# Altium PCB Test.PcbDoc
Units mm, origin at the board's own origin, x right, y up, seen from the top; angles counter-clockwise.
Board outline 110.4 x 66.5 mm, 2 copper layers (Top Layer, Bottom Layer); 148 components, 118 nets, 579 pads, 1 vias.
Unrouted connection lines stored in the file: 289.
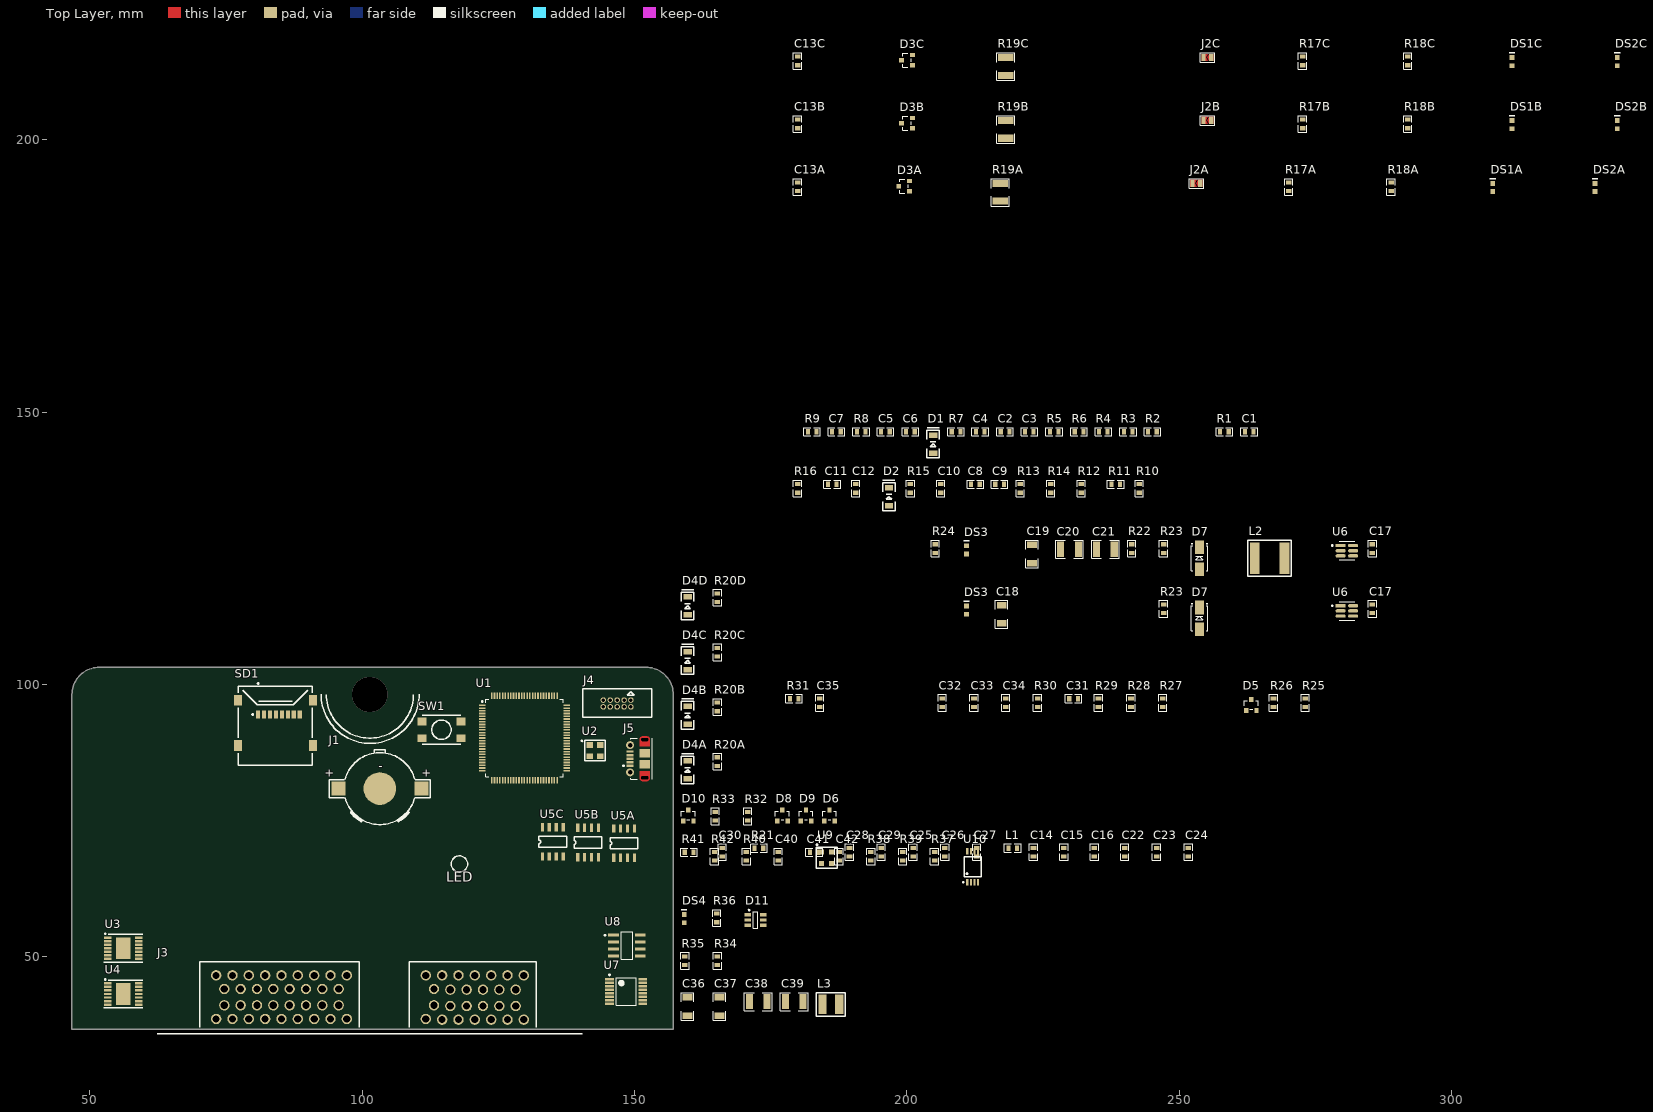
[diagram p0: Top Layer view]
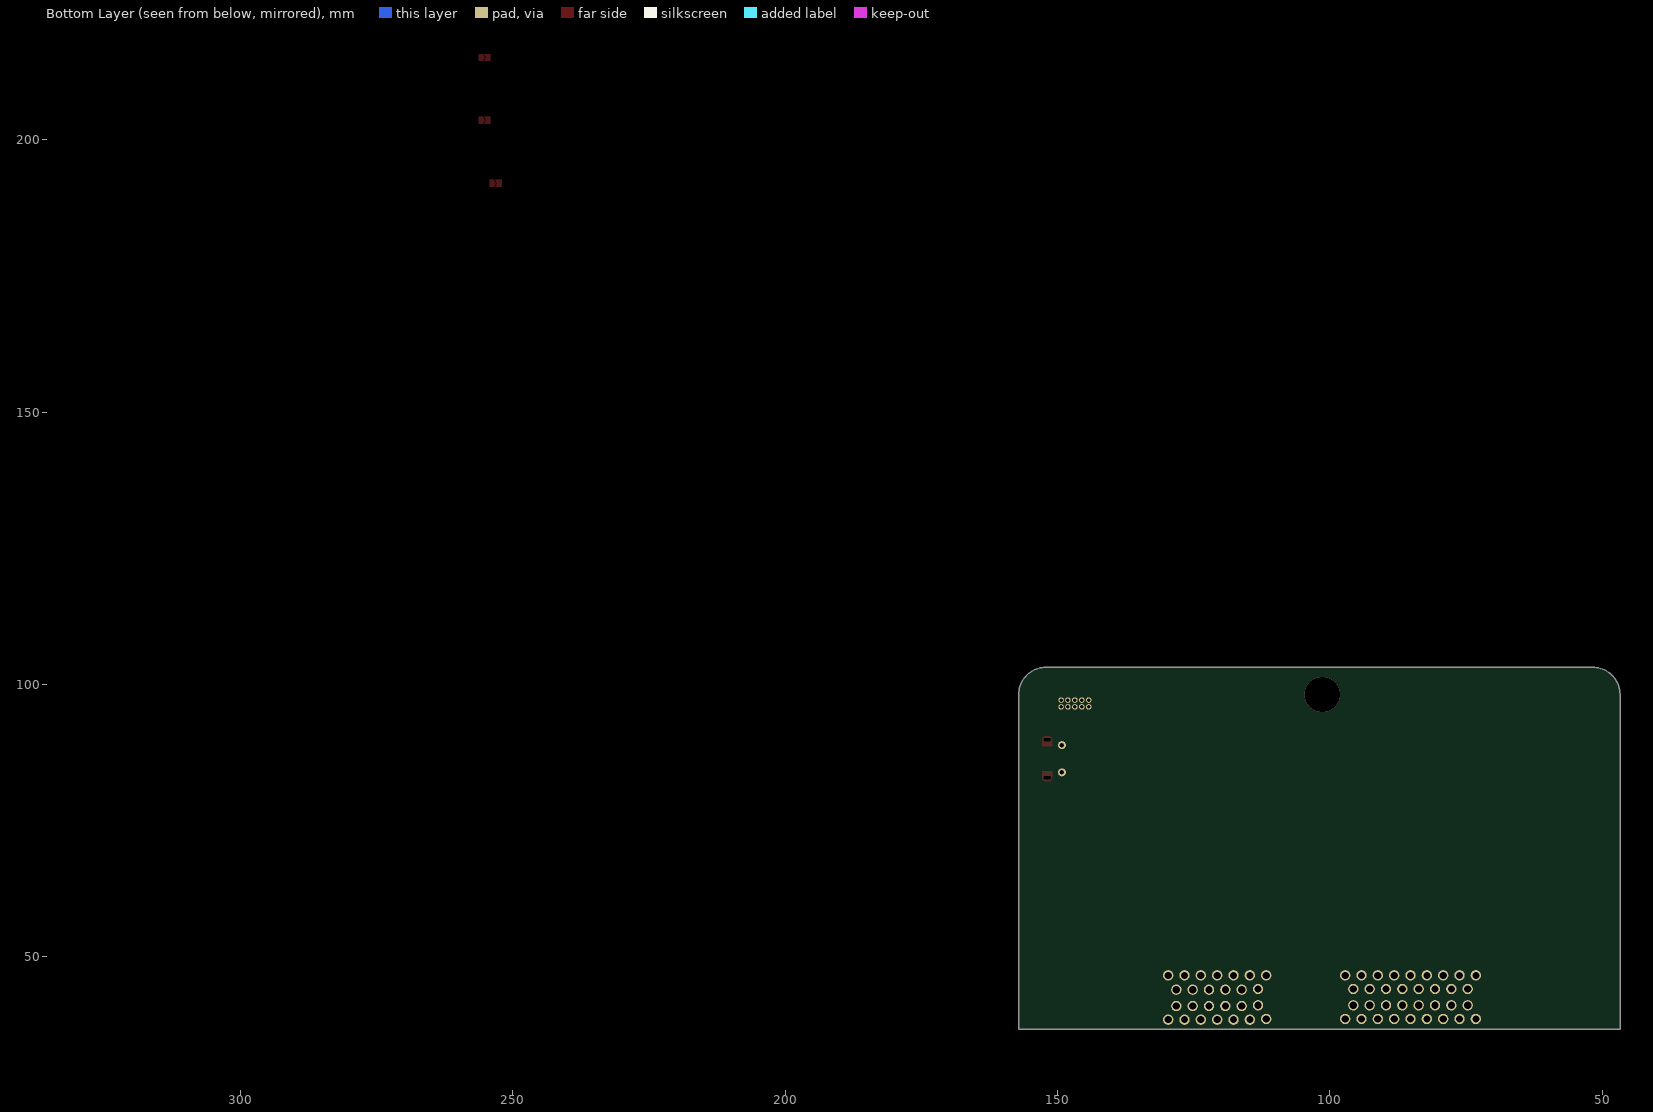
[diagram p1: Bottom Layer view, seen from below]

## Layer stack, top to bottom
Top Solder: solder mask 0.0102, Solder Resist, Dk 3.5
Top Layer: signal copper 0.0356
Dielectric 1: dielectric 0.32, FR-4, Dk 4.8
Bottom Layer: signal copper 0.0356
Bottom Solder: solder mask 0.0102, Solder Resist, Dk 3.5

## Board outline
46.718,36.663 157.118,36.663 157.118,98.163 ccw(c152.118,98.163) 152.118,103.163 51.718,103.163 ccw(c51.718,98.163) 46.718,98.163

## Design rules (kind name [scope] priority, off if disabled: settings)
Clearance [All] p1: gap=0.254 ignorepadtopadclearanceinfootprint=FALSE except(0: Arc-Hole Track-Hole SMDPad-Hole THPad-Hole Via-Hole Fill-Hole Poly-Hole Region-Hole Text-Hole)
DiffPairsRouting [All] p1: maxlimit=0.254 minlimit=0.254 mostfreqgap=0.254 toplayer_minwidth=0.381 toplayer_maxwidth=0.381 toplayer_prefwidth=0.381 bottomlayer_minwidth=0.381 bottomlayer_maxwidth=0.381 bottomlayer_prefwidth=0.381 maxuncoupledlength=12.7
PolygonConnect [All] p1: connectstyle=Relief reliefconductorwidth=0.254 reliefentries=4 polygonreliefangle="90 Angle" airgapwidth=0.254
RoutingVias [All] p1: holewidth=0.711 width=1.27 viastyle="Through Hole" minholewidth=0.711 minwidth=1.27 maxholewidth=0.711 maxwidth=1.27
SolderMaskExpansion [All] p1: expansion=0.102 istentingtop=FALSE
Width [All] p1: maxlimit=0.254 minlimit=0.254 preferedwidth=0.254
29 further rules are at their usual default settings.

## Classes and differential pairs
channel class CC-S07-V00-AnalogueIn: "Analog In1" "Analog In2" "Analog In3" "Analog In4" "Analog In5" "Analog In6" "Analog In7" "Analog In8" "Analog In9" "Analog In10" "Analog In11" "Analog In12"
channel class CC-S06-V00-DigitalIn: "Digital In1" "Digital In2" "Digital In3" "Digital In4"
net class DOUT[1..4]: DOUT1 DOUT2 DOUT3 DOUT4
net class DIN[1..4]: DIN1 DIN2 DIN3 DIN4
net class AOUT[1..12]: AOUT1 AOUT2 AOUT3 AOUT4 AOUT5 AOUT6 AOUT7 AOUT8 AOUT9 AOUT10 AOUT11 AOUT12
net class AIN[1..12]: AIN1 AIN2 AIN3 AIN4 AIN5 AIN6 AIN7 AIN8 AIN9 AIN10 AIN11 AIN12
component class "Power Selection": C40 C41 C42 R37 R38 R39 R40 R41 R42 U10
component class "Digital In4": D4D R20D
component class "Digital In3": D4C R20C
component class "Digital In2": D4B R20B
component class "Digital In1": D4A R20A
component class "Micocontroller Peripherals": C31 C32 C33 C34 C35 D11 DS4 J5 R25 R26 R27 R28 R29 R30 R31 R36 SD1
channel class CC-S03-V00-CANBUS: "CANBUS 1" "CANBUS 2" "CANBUS 3"
net class HSOUT[1..4]: HSOUT1 HSOUT2 HSOUT3 HSOUT4
net class HSEN[1..4]: HSEN1 HSEN2 HSEN3 HSEN4
net class HSDIAG[1..4]: HSDIAG1 HSDIAG2 HSDIAG3 HSDIAG4
net class HSADC[1..2]: HSADC1 HSADC2
component class "Serial Communications": D5 D6 D8 D9 D10 R32 R33 U7 U8
component class Microcontroller: C14 C15 C16 C22 C23 C24 C25 C26 C27 C28 C29 C30 J1 J4 L1 R21 SW1 U1 U2 U9
component class "High Side Outputs": C1 C2 C3 C4 C5 C6 C7 C8 C9 C10 C11 C12 D1 D2 R1 R2 R3 R4 R5 R6 R7 R8 R9 R10 R11 R12 R13 R14 R15 R16 U3 U4
component class Connector: J3
component class "CANBUS 3": C13C D3C DS1C DS2C J2C R17C R18C R19C U5C
component class "CANBUS 2": C13B D3B DS1B DS2B J2B R17B R18B R19B U5B
component class "CANBUS 1": C13A D3A DS1A DS2A J2A R17A R18A R19A U5A
component class "5V Supply": C17 D7 DS3 R23 R34 R35 U6
component class "3V3 Supply": C17 C36 C37 C38 C39 D7 DS3 L3 R23 U6
differential pair USB: +USB_P -USB_N
differential pair "USB ESD D": +"USB ESD D_P" -"USB ESD D_N"
differential pair "USB D": +"USB D_P" -"USB D_N"

## Components (designator, comment, footprint, x,y, rotation, side; value= is the part's Value field where it differs from the comment)
C1 "100nF" Cap_Ceramic_0603 262.89,146.431 r0 top
C2 "10nF" Cap_Ceramic_0603 218.059,146.431 r0 top
C3 "10nF" Cap_Ceramic_0603 222.504,146.431 r0 top
C4 "47nF" Cap_Ceramic_0603 213.487,146.431 r0 top
C5 "100nF" Cap_Ceramic_0603 196.088,146.431 r0 top
C6 "100nF" Cap_Ceramic_0603 200.66,146.431 r0 top
C7 "100nF" Cap_Ceramic_0603 187.071,146.431 r0 top
C8 "10nF" Cap_Ceramic_0603 212.598,136.779 r0 top
C9 "10nF" Cap_Ceramic_0603 217.043,136.779 r0 top
C10 "47nF" Cap_Ceramic_0603 206.248,136.017 r90 top
C11 "100nF" Cap_Ceramic_0603 186.309,136.779 r0 top
C12 "100nF" Cap_Ceramic_0603 190.627,136.017 r90 top
C13A "100nF" Cap_Ceramic_0603 179.959,191.389 r90 top (schematic designator C13)
C13B "100nF" Cap_Ceramic_0603 179.959,202.946 r90 top (schematic designator C13)
C13C "100nF" Cap_Ceramic_0603 179.959,214.503 r90 top (schematic designator C13)
C14 "4u7" Cap_Ceramic_0603 223.266,69.215 r90 top
C15 "100nF" Cap_Ceramic_0603 228.854,69.215 r90 top
C16 "100nF" Cap_Ceramic_0603 234.442,69.215 r90 top
C17 "100nF 100V" Cap_Ceramic_0603 285.496,113.919 r90 top
C17 "100nF 100V" Cap_Ceramic_0603 285.496,124.968 r90 top
C18 "22uF 35V 1206" Cap_Ceramic_1206 217.424,112.903 r90 top
C19 "22uF 35V 1206" Cap_Ceramic_1206 223.012,123.952 r90 top
C20 "47uF 16V 1210" Cap_Ceramic_1210 229.87,124.841 r0 top
C21 "47uF 16V 1210" Cap_Ceramic_1210 236.474,124.841 r0 top
C22 "100nF" Cap_Ceramic_0603 240.03,69.215 r90 top
C23 "100nF" Cap_Ceramic_0603 245.872,69.215 r90 top
C24 "100nF" Cap_Ceramic_0603 251.714,69.215 r90 top
C25 "1uF" Cap_Ceramic_0603 201.168,69.215 r90 top
C26 "100nF" Cap_Ceramic_0603 207.01,69.215 r90 top
C27 "10nF" Cap_Ceramic_0603 212.852,69.215 r90 top
C28 "2u2" Cap_Ceramic_0603 189.484,69.215 r90 top
C29 "2u2" Cap_Ceramic_0603 195.326,69.215 r90 top
C30 "100nF" Cap_Ceramic_0603 166.116,69.215 r90 top
C31 "100nF" Cap_Ceramic_0603 230.632,97.409 r0 top
C32 "4u7" Cap_Ceramic_0603 206.502,96.647 r90 top
C33 "1uF" Cap_Ceramic_0603 212.344,96.647 r90 top
C34 "100nF" Cap_Ceramic_0603 218.186,96.647 r90 top
C35 "100nF" Cap_Ceramic_0603 184.023,96.647 r90 top
C36 "22uF 35V 1206" Cap_Ceramic_1206 159.766,40.894 r90 top
C37 "22uF 35V 1206" Cap_Ceramic_1206 165.608,40.894 r90 top
C38 "47uF 16V 1210" Cap_Ceramic_1210 172.72,41.783 r0 top
C39 "47uF 16V 1210" Cap_Ceramic_1210 179.324,41.783 r0 top
C40 "1uF" Cap_Ceramic_0603 176.403,68.453 r90 top
C41 "100nF" Cap_Ceramic_0603 183.007,69.215 r0 top
C42 "100nF" Cap_Ceramic_0603 187.579,68.453 r90 top
D1 "BZT52B3V3-G3-08" SOD123 204.851,144.145 r90 top
D2 "BZT52B3V3-G3-08" SOD123 196.723,134.493 r90 top
D3A "NUP2105L" NUP2105L 199.517,191.516 r90 top (schematic designator D3)
D3B "NUP2105L" NUP2105L 200.025,203.073 r90 top (schematic designator D3)
D3C "NUP2105L" NUP2105L 200.025,214.63 r90 top (schematic designator D3)
D4A "BZT52B3V3-G3-08" SOD123 159.766,84.328 r90 top (schematic designator D4)
D4B "BZT52B3V3-G3-08" SOD123 159.766,94.361 r90 top (schematic designator D4)
D4C "BZT52B3V3-G3-08" SOD123 159.766,104.394 r90 top (schematic designator D4)
D4D "BZT52B3V3-G3-08" SOD123 159.766,114.427 r90 top (schematic designator D4)
D5 "NUP2105L" NUP2105L 263.271,96.266 r0 top
D6 "NUP2105L" NUP2105L 185.801,75.946 r0 top
D7 "B260A-13-F" SMA 253.746,112.141 r90 top
D7 "B260A-13-F" SMA 253.746,123.19 r90 top
D8 "NUP2105L" NUP2105L 177.165,75.946 r0 top
D9 "NUP2105L" NUP2105L 181.483,75.946 r0 top
D10 "NUP2105L" NUP2105L 159.893,75.946 r0 top
D11 "USBLC6-2SC6" USBLC6-2SC6 172.212,56.769 r0 top
DS1A "LED Blue 0603" "LED BLUE 0603" 307.594,191.262 r90 top (schematic designator DS1)
DS1B "LED Blue 0603" "LED BLUE 0603" 311.15,202.819 r90 top (schematic designator DS1)
DS1C "LED Blue 0603" "LED BLUE 0603" 311.15,214.376 r90 top (schematic designator DS1)
DS2A "LED Blue 0603" "LED BLUE 0603" 326.39,191.262 r90 top (schematic designator DS2)
DS2B "LED Blue 0603" "LED BLUE 0603" 330.454,202.819 r90 top (schematic designator DS2)
DS2C "LED Blue 0603" "LED BLUE 0603" 330.454,214.376 r90 top (schematic designator DS2)
DS3 "LED Green 0603" "LED GREEN 0603" 210.947,113.665 r90 top
DS3 "LED Green 0603" "LED GREEN 0603" 210.947,124.714 r90 top
DS4 "LED Green 0603" "LED GREEN 0603" 159.131,57.023 r90 top
J1 "Keystone 2984" "KEYSTONE 2894" 103.251,80.899 r180 top
J2A "Jumper 2Way Solderable" Jumper_2Way_Solderable 253.873,192.024 r90 top (schematic designator J2)
J2B "Jumper 2Way Solderable" Jumper_2Way_Solderable 255.905,203.581 r90 top (schematic designator J2)
J2C "Jumper 2Way Solderable" Jumper_2Way_Solderable 255.905,215.138 r90 top (schematic designator J2)
J3 "3-6437285-2" "SUPERSEAL RIGHT 60WAY" 104.434,32.095 r0 top
J4 "IDC 10P 2x5 1.27mm" "IDC 1.27MM 10P" 146.812,96.52 r180 top
J5 "105017-0001" 105017-0001 150.542,86.376 r90 top
L1 "10uH" Inductor_0603 219.456,69.977 r0 top
L2 "74404064221" Inductor_6x6mm 266.573,123.19 r0 top
L3 "74404042470" INDUCTOR_4X3MM_1.8MM 186.055,41.275 r0 top
R1 "4k7" Res_ThinFilm_0603 258.318,146.431 r0 top
R2 "4k7" Res_ThinFilm_0603 245.11,146.431 r0 top
R3 "4k7" Res_ThinFilm_0603 240.665,146.431 r0 top
R4 "4k7" Res_ThinFilm_0603 236.093,146.431 r0 top
R5 "4k7" Res_ThinFilm_0603 227.076,146.431 r0 top
R6 "4k7" Res_ThinFilm_0603 231.648,146.431 r0 top
R7 "1k2" Res_ThinFilm_0603 209.042,146.431 r0 top
R8 "47R" Res_ThinFilm_0603 191.643,146.431 r0 top
R9 "4k7" Res_ThinFilm_0603 182.626,146.431 r0 top
R10 "4k7" Res_ThinFilm_0603 242.697,136.017 r90 top
R11 "4k7" Res_ThinFilm_0603 238.379,136.779 r0 top
R12 "4k7" Res_ThinFilm_0603 232.029,136.017 r90 top
R13 "4k7" Res_ThinFilm_0603 220.853,136.017 r90 top
R14 "4k7" Res_ThinFilm_0603 226.441,136.017 r90 top
R15 "1k2" Res_ThinFilm_0603 200.66,136.017 r90 top
R16 "47R" Res_ThinFilm_0603 179.959,136.017 r90 top
R17A "330R 5% 0603" Res_ThinFilm_0603 270.129,191.389 r90 top (schematic designator R17)
R17B "330R 5% 0603" Res_ThinFilm_0603 272.669,202.946 r90 top (schematic designator R17)
R17C "330R 5% 0603" Res_ThinFilm_0603 272.669,214.503 r90 top (schematic designator R17)
R18A "330R 5% 0603" Res_ThinFilm_0603 288.925,191.389 r90 top (schematic designator R18)
R18B "330R 5% 0603" Res_ThinFilm_0603 291.973,202.946 r90 top (schematic designator R18)
R18C "330R 5% 0603" Res_ThinFilm_0603 291.973,214.503 r90 top (schematic designator R18)
R19A "120R 1% 1210" Res_ThinFilm_1210 217.17,190.373 r90 top (schematic designator R19)
R19B "120R 1% 1210" Res_ThinFilm_1210 218.186,201.93 r90 top (schematic designator R19)
R19C "120R 1% 1210" Res_ThinFilm_1210 218.186,213.487 r90 top (schematic designator R19)
R20A "10k 5% 0603" Res_ThinFilm_0603 165.227,85.852 r90 top (schematic designator R20)
R20B "10k 5% 0603" Res_ThinFilm_0603 165.227,95.885 r90 top (schematic designator R20)
R20C "10k 5% 0603" Res_ThinFilm_0603 165.227,105.918 r90 top (schematic designator R20)
R20D "10k 5% 0603" Res_ThinFilm_0603 165.227,115.951 r90 top (schematic designator R20)
R21 "4k7 5% 0603" Res_ThinFilm_0603 172.847,69.977 r0 top
R22 "64k9 1%" Res_ThinFilm_0603 241.3,124.968 r90 top
R23 "1k" Res_ThinFilm_0603 247.142,113.919 r90 top
R23 "1k" Res_ThinFilm_0603 247.142,124.968 r90 top
R24 "19k6 1%" Res_ThinFilm_0603 205.232,124.968 r90 top
R25 "10k" Res_ThinFilm_0603 273.177,96.647 r90 top
R26 "15k" Res_ThinFilm_0603 267.335,96.647 r90 top
R27 "22R" Res_ThinFilm_0603 247.015,96.647 r90 top
R28 "22R" Res_ThinFilm_0603 241.173,96.647 r90 top
R29 "100k" Res_ThinFilm_0603 235.204,96.647 r90 top
R30 "100k" Res_ThinFilm_0603 224.028,96.647 r90 top
R31 "100k" Res_ThinFilm_0603 179.324,97.409 r0 top
R32 "1k 5% 0603" Res_ThinFilm_0603 170.815,75.819 r90 top
R33 "1k 5% 0603" Res_ThinFilm_0603 164.846,75.819 r90 top
R34 "111k 1%" Res_ThinFilm_0603 165.227,49.276 r90 top
R35 "20k 1%" Res_ThinFilm_0603 159.258,49.276 r90 top
R36 "1k" Res_ThinFilm_0603 165.1,57.15 r90 top
R37 "10k" Res_ThinFilm_0603 205.105,68.453 r90 top
R38 "0R" Res_ThinFilm_0603 193.421,68.453 r90 top
R39 "DNF 0603" Res_ThinFilm_0603 199.263,68.453 r90 top
R40 "820R" Res_ThinFilm_0603 170.561,68.453 r90 top
R41 "DNF 0603" Res_ThinFilm_0603 160.02,69.215 r0 top
R42 "0R" Res_ThinFilm_0603 164.719,68.453 r90 top
SD1 "47219-2001" 47219-2001 84.074,92.964 r0 top
SW1 "BTN Standard 4.5mm" "BTN STANDARD 4.5mm X 4.5mm" 114.554,91.694 r180 top
U1 "STM32F765VI" LQFP-100 129.794,90.17 r0 top
U2 "DSC1001DI1-008.0000T" DSC1001DI1-008.0000TCT-ND 142.748,87.884 r0 top
U3 "BTS7080-2EPA" BTS70802EPA 56.134,51.562 r0 top
U4 "BTS7080-2EPA" BTS70802EPA 56.134,43.18 r0 top
U5A "SN65HVD233" SN65HVD233DR 148.082,70.866 r90 top (schematic designator U5)
U5B "SN65HVD233" SN65HVD233DR 141.478,70.993 r90 top (schematic designator U5)
U5C "SN65HVD233" SN65HVD233DR 135.001,71.12 r90 top (schematic designator U5)
U6 "LMR14010" LMR14010 280.797,113.538 r0 top
U6 "LMR14010" LMR14010 280.797,124.587 r0 top
U7 "MAX3232ECPWR" PW0016A_M 148.461,43.632 r0 top
U8 "MAX3490EESA+" FP-S8-5-MFG 148.59,52.07 r0 top
U9 "DSC6083CI2A-032K768" DSC6083CI2A-032K768 185.293,68.199 r0 top
U10 "TPS2115A" TPS2115A 212.09,66.548 r90 top

## Footprints (in the part's own frame and the unit in brackets; to place one, negate y for a bottom-side part, rotate by r counter-clockwise, add the part's x,y. Pads: shape width x height; smd on the part's side, far side on the other; paste and mask are expansions set on the pad)
47219-2001 [mm]
  rect 0.8x1.5 smd: 1(-3.205,1.55) 2(-2.105,1.55) 3(-1.005,1.55) 4(0.095,1.55) 5(1.195,1.55) 6(2.295,1.55) 7(3.395,1.55) 8(4.495,1.55)
  rect 1.45x2 smd: 9(6.875,4.15) 10(6.875,-4.15) 11(-6.875,-4.15) 12(-6.875,4.15)
  silkscreen extent -6.8,-7.8 6.8,7.36, body extent -7.3,-7.79 7.3,6.71, height 1.91
105017-0001 [mm]
  rect 0.4x1.35 smd: 1(-1.3,1.35) 2(-0.65,1.35) 3(0,1.35) 4(0.65,1.35) 5(1.3,1.35)
  round 1.45 hole 0.85: 6(-2.5,1.35) 7(2.5,1.35)
  rrect50% 0x0 hole 0.6 slot 1.3 at 90 deg: 8(-3.5,-1.35) 11(3.5,-1.35)
  rect 1.5x1.9 smd: 9(-1,-1.35) 10(1,-1.35)
  Top Layer circle w0.5: c3.6,-0.9 r0.25
  Top Layer circle w0.5: c3.6,-1.8 r0.25
  Top Layer circle w0.5: c-3.6,-0.9 r0.25
  Top Layer circle w0.5: c-3.6,-1.8 r0.25
  Top Layer region: -2.3,-2.3 -2.3,-0.4 -3.6,-0.4 -3.6,-2.3
  Top Layer region: 2.3,-0.4 2.3,-2.3 3.6,-2.3 3.6,-0.4
  Top Layer region: 3.6,-0.9 3.6,-1.8 4.1,-1.8 4.1,-0.9
  Top Layer region: -3.6,-1.8 -3.6,-0.9 -4.1,-0.9 -4.1,-1.8
  silkscreen extent -3.75,-2.69 3.75,2.7, body extent -4.1,-3.9 4.1,1.5, height 2.67
"BTN STANDARD 4.5mm X 4.5mm" [mil]
  rect 65x55 smd: 1(-140,60) 2(140,60) 3(-140,-60) 4(140,-60)
  silkscreen extent -140,-105 140,105, body extent -148,-89 148,89, height 165
BTS70802EPA [mm]
  rect 1.32x0.45 smd: 1(-2.85,1.95) 2(-2.85,1.3) 3(-2.85,0.65) 4(-2.85,0) 5(-2.85,-0.65) 6(-2.85,-1.3) 7(-2.85,-1.95) 8(2.85,-1.95) 9(2.85,-1.3) 10(2.85,-0.65) 11(2.85,0) 12(2.85,0.65) 13(2.85,1.3) 14(2.85,1.95)
  rect 2.65x4 smd: 15(0,0)
  silkscreen extent -3.56,-2.54 3.56,2.79
Cap_Ceramic_0603 [mil]
  rect 30x40 smd: 1(-31.24,0) 2(31.24,0)
  silkscreen extent -60,-30 60,30, body extent -31,-16 32,16, height 33
Cap_Ceramic_1206 [mil]
  rect 47x71 smd: 1(-66.08,0) 2(66.08,0)
  silkscreen extent -100,-45 100,45, body extent -63,-31 63,32, height 53
Cap_Ceramic_1210 [mm]
  rect 1.3x2.8 smd: 1(-1.625,0) 2(1.625,0)
  silkscreen extent -2.54,-1.65 2.54,1.65, body extent -1.6,-1.25 1.6,1.25, height 1.35
DSC1001DI1-008.0000TCT-ND [mm]
  rect 1.219x1.092 smd: 1(-0.95,1.05) 2(0.95,1.05) 3(0.95,-1.05) 4(-0.95,-1.05)
  silkscreen extent -2.54,-1.91 1.91,1.91, body extent -1.25,-1.6 1.25,1.6, height 0.85
DSC6083CI2A-032K768 [mm]
  rect 1x0.9 smd: 1(-0.95,1.05) 2(-0.95,-1.05) 3(0.95,-1.05) 4(0.95,1.05)
  silkscreen extent -1.91,-1.91 1.91,2.54, body extent -1.25,-1.6 1.25,1.65, height 1.15
FP-S8-5-MFG [mm]
  rect 1.98x0.53 smd paste+0 mask+0: 1(-2.465,1.905) 2(-2.465,0.635) 3(-2.465,-0.635) 4(-2.465,-1.905) 5(2.465,-1.905) 6(2.465,-0.635) 7(2.465,0.635) 8(2.465,1.905)
  silkscreen extent -4.15,-2.5 1.05,2.5, body extent -3.55,-2.75 3.55,2.75, height 0.25
"IDC 1.27MM 10P" [mil]
  round 40 hole 25: 1(-100,-25) 2(-100,25) 3(-50,-25) 4(-50,25) 5(0,-25) 6(0,25) 7(50,-25) 8(50,25) 9(100,-25) 10(100,25)
  silkscreen extent -250,-105 250,100, body extent -249,-104 249,100, height 214
INDUCTOR_4X3MM_1.8MM [mm]
  rect 1.5x3.6 smd: 1(-1.55,0) 2(1.55,0)
  silkscreen extent -2.67,-2.16 2.67,2.16, body extent -2,-2 2,2, height 1.8
Inductor_6x6mm [mm]
  rect 1.8x5.7 smd: 1(-2.667,0) 2(2.794,0)
  silkscreen extent -3.94,-3.3 4.06,3.3, body extent -3,-3 3,3, height 4.56
Inductor_0603 [mil]
  rect 30x40 smd: 1(-31.24,0) 2(31.24,0)
  silkscreen extent -60,-30 60,30, body extent -31,-16 32,16, height 18
Jumper_2Way_Solderable [mil]
  rect 50x30 smd: 1(0,55) 2(0,0)
  Top Layer region: -25,25 0,40 25,25 25,70 -25,70
  Top Layer region: -25,15 0,30 25,15 25,-15 0,-15 -25,-15
  silkscreen extent -35,-25 35,80
"KEYSTONE 2894" [mm]
  rect 2.54x2.54 smd: 1(-7.62,0) 1(7.62,0)
  round 6 smd paste-25.4: 2(0,0)
  silkscreen extent -9.27,-7.11 9.27,6.6, body extent -9.02,-7.42 8.76,6.03, height 2.41
"LED BLUE 0603" [mil]
  rect 35x35 smd: 1(-30,0) 2(30,0)
  silkscreen extent 65,-20 65,20, body extent -40,-20 40,20, height 30
"LED GREEN 0603" [mil]
  rect 35x35 smd: 1(-30,0) 2(30,0)
  silkscreen extent 65,-20 65,20, body extent -40,-20 40,20, height 30
LMR14010 [mm]
  rect 1.854x0.612 smd paste+0: 1(-1.136,0.933)
  rrect100% 1.854x0.612 smd paste+0: 2(-1.136,-0.017) 3(-1.136,-0.967) 4(1.164,-0.967) 5(1.164,-0.017) 6(1.164,0.933)
  silkscreen extent -2.79,-1.72 1.41,1.68, body extent -1.39,-1.47 1.41,1.43, height 1.1
LQFP-100 [mm]
  rect 1.2x0.3 smd paste+0: 1(-7.75,6.001) 2(-7.75,5.501) 3(-7.75,5.001) 4(-7.75,4.501) 5(-7.75,4.001) 6(-7.75,3.501) 7(-7.75,3.001) 8(-7.75,2.501) 9(-7.75,2.001) 10(-7.75,1.501) 11(-7.75,1.001) 12(-7.75,0.501) 13(-7.75,0.001) 14(-7.75,-0.499) 15(-7.75,-0.999) 16(-7.75,-1.499) 17(-7.75,-1.999) 18(-7.75,-2.499) 19(-7.75,-2.999) 20(-7.75,-3.499) 21(-7.75,-3.999) 22(-7.75,-4.499) 23(-7.75,-4.999) 24(-7.75,-5.499) 25(-7.75,-5.999) 51(7.75,-5.999) 52(7.75,-5.499) 53(7.75,-4.999) 54(7.75,-4.499) 55(7.75,-3.999) 56(7.75,-3.499) 57(7.75,-2.999) 58(7.75,-2.499) 59(7.75,-1.999) 60(7.75,-1.499) 61(7.75,-0.999) 62(7.75,-0.499) 63(7.75,0.001) 64(7.75,0.501) 65(7.75,1.001) 66(7.75,1.501) 67(7.75,2.001) 68(7.75,2.501) 69(7.75,3.001) 70(7.75,3.501) 71(7.75,4.001) 72(7.75,4.501) 73(7.75,5.001) 74(7.75,5.501) 75(7.75,6.001)
  rect 0.3x1.2 smd paste+0: 26(-6,-7.749) 27(-5.5,-7.749) 28(-5,-7.749) 29(-4.5,-7.749) 30(-4,-7.749) 31(-3.5,-7.749) 32(-3,-7.749) 33(-2.5,-7.749) 34(-2,-7.749) 35(-1.5,-7.749) 36(-1,-7.749) 37(-0.5,-7.749) 38(0,-7.749) 39(0.5,-7.749) 40(1,-7.749) 41(1.5,-7.749) 42(2,-7.749) 43(2.5,-7.749) 44(3,-7.749) 45(3.5,-7.749) 46(4,-7.749) 47(4.5,-7.749) 48(5,-7.749) 49(5.5,-7.749) 50(6,-7.749) 76(6,7.751) 77(5.5,7.751) 78(5,7.751) 79(4.5,7.751) 80(4,7.751) 81(3.5,7.751) 82(3,7.751) 83(2.5,7.751) 84(2,7.751) 85(1.5,7.751) 86(1,7.751) 87(0.5,7.751) 88(0,7.751) 89(-0.5,7.751) 90(-1,7.751) 91(-1.5,7.751) 92(-2,7.751) 93(-2.5,7.751) 94(-3,7.751) 95(-3.5,7.751) 96(-4,7.751) 97(-4.5,7.751) 98(-5,7.751) 99(-5.5,7.751) 100(-6,7.751)
  silkscreen extent -7.87,-7.1 7.1,7.1, body extent -8.01,-8.01 8.01,8.01, height 1.6
NUP2105L [mm]
  rect 0.8x0.9 smd: 1(-0.95,-1) 2(0.95,-1) 3(0,1)
  silkscreen extent -1.27,-0.76 1.27,0.76, body extent -1.45,-1.22 1.45,1.18, height 1
PW0016A_M [mm] "SOP, 16-Leads, Body 5.1x4.5mm, Pitch 0.65mm, IPC Low Density"
  rrect22% 1.6x0.45 smd: 1(-3.05,2.275) 2(-3.05,1.625) 3(-3.05,0.975) 4(-3.05,0.325) 5(-3.05,-0.325) 6(-3.05,-0.975) 7(-3.05,-1.625) 8(-3.05,-2.275) 9(3.05,-2.275) 10(3.05,-1.625) 11(3.05,-0.975) 12(3.05,-0.325) 13(3.05,0.325) 14(3.05,0.975) 15(3.05,1.625) 16(3.05,2.275)
  silkscreen extent -3.17,-2.55 1.85,3.17, body extent -3.21,-2.5 3.21,2.5, height 1
Res_ThinFilm_0603 [mil]
  rect 30x40 smd: 1(-31.24,0) 2(31.24,0)
  silkscreen extent -60,-30 60,30, body extent -31,-16 32,16, height 18
Res_ThinFilm_1210 [mm]
  rect 1.3x2.8 smd: 1(-1.625,0) 2(1.625,0)
  silkscreen extent -2.54,-1.65 2.54,1.65, body extent -1.6,-1.25 1.6,1.25, height 0.6
SMA [mm]
  rect 2.5x1.7 smd: A(-2,0) K(2,0)
  silkscreen extent -2.3,-1.52 2.67,1.52, body extent -2.52,-1.46 2.52,1.46, height 2.4
SN65HVD233DR [mm]
  rect 1.55x0.6 smd: 1(-2.7,1.903) 2(-2.7,0.633) 3(-2.7,-0.637) 4(-2.7,-1.907) 5(2.7,-1.907) 6(2.7,-0.637) 7(2.7,0.633) 8(2.7,1.903)
  silkscreen extent -1.04,-2.54 1.04,2.54, body extent -3.01,-2.45 3.01,2.45, height 1.63
SOD123 [mil]
  rect 40x60 smd: A(-65,0) K(65,0)
  silkscreen extent -100,-45 118,45, body extent -74,-33 74,33, height 47
"SUPERSEAL RIGHT 60WAY" [mm]
  round 1.905 hole 1.321: A1(7.25,14.5) A2(10.25,14.5) A3(13.25,14.5) A4(16.25,14.5) A5(19.25,14.5) A6(22.25,14.5) A7(25.25,14.5) A8(8.75,12) A9(11.75,11.873) A10(14.75,11.873) A11(17.75,11.873) A12(20.75,11.873) A13(23.75,11.873) A14(8.75,9) A15(11.75,8.873) A16(14.75,8.873) A17(17.75,8.873) A18(20.75,8.873) A19(23.75,8.873) A20(7.25,6.5) A21(10.25,6.373) A22(13.25,6.373) A23(16.25,6.373) A24(19.25,6.373) A25(22.25,6.373) A26(25.25,6.373) B1(-31.25,14.5) B2(-28.25,14.5) B3(-25.25,14.5) B4(-22.25,14.5) B5(-19.25,14.5) B6(-16.25,14.5) B7(-13.25,14.5) B8(-10.25,14.5) B9(-7.25,14.5) B10(-29.75,12) B11(-26.75,12) B12(-23.75,12) B13(-20.75,12) B14(-17.75,12) B15(-14.75,12) B16(-11.75,12) B17(-8.75,12) B18(-29.75,9) B19(-26.75,9) B20(-23.75,9) B21(-20.75,9) B22(-17.75,9) B23(-14.75,9) B24(-11.75,9) B25(-8.75,9) B26(-31.25,6.5) B27(-28.25,6.5) B28(-25.25,6.5) B29(-22.25,6.5) B30(-19.25,6.5) B31(-16.25,6.5) B32(-13.25,6.5) B33(-10.25,6.5) B34(-7.25,6.5)
  rect 0x0 hole 3.3: N/C(-38.5,0) N/C(0,0) N/C(32.5,0)
  silkscreen extent -42.04,3.81 35.94,17.02, body extent -42.3,-19.48 35.7,17.02, height 24.75
TPS2115A [mm]
  rect 1.2x0.4 smd: 1(-2.85,0.975) 2(-2.85,0.325) 3(-2.85,-0.325) 4(-2.85,-0.975) 5(2.85,-0.975) 6(2.85,-0.325) 7(2.85,0.325) 8(2.85,0.975)
  silkscreen extent -2.98,-1.55 1.85,1.85, body extent -3.23,-1.5 3.23,1.5, height 1.2
USBLC6-2SC6 [mm] "USBLC6-2SC6"
  rect 1.2x0.6 smd: 1(-1.397,0.95) 2(-1.397,0) 3(-1.397,-0.95) 4(1.397,-0.95) 5(1.397,0) 6(1.397,0.95)
  silkscreen extent -1.27,-1.55 0.38,1.92, body extent -1.6,-1.52 1.6,1.53, height 1.5

## Part data
C1 C5 C6 C7 C11 C12 C13A C13B C13C C15 C16 C22 C23 C24 C26 C30 C31 C34 C35 C41 C42: library part "100nF 50V 5% X7R 0603", "Capacitor, Ceramic, SMD, 100nF, 50V, 5%, X7R, 0603"
C2 C3 C8 C9 C27: library part "10nF 50V 5% X7R 0603", "Capacitor, Ceramic, SMD, 10nF, 50V, 5%, X7R, 0603"
C4 C10: library part "47nF 50V 5% X7R 0603", "Capacitor, Ceramic, SMD, 47nF, 50V, 5%, X7R, 0603"
C14 C32: library part "4u7 50V 5% X7R 0603", "Capacitor, Ceramic, SMD, 4u7, 50V, 5%, X7R, 0603"
C17 C17: library part "100nF 100V 5% X7R 0603", "Capacitor, Ceramic, SMD, 100nF, 100V, 5%, X7R, 0603"
C18 C19 C36 C37: library part "22uF 35V 10% X7R 1206", "Capacitor, Ceramic, SMD, 22uF, 35V, 10%, X7R, 1206"
C20 C21 C38 C39: library part "47uF 16V 10% X7R 1210", "Capacitor, Ceramic, SMD, 47uF, 16V, 5%, X7R, 1210"
C25 C33 C40: library part "1uF 25V 5% X7R 0603", "Capacitor, Ceramic, SMD, 1uF, 25V, 5%, X7R, 0603"
C28 C29: library part "2u2 25V 5% X7R 0603", "Capacitor, Ceramic, SMD, 2u2, 25V, 5%, X7R, 0603"
D1 D2 D4A D4B D4C D4D: "Diode, SMD, Zenner, 3.3V, 2%, 410mW, SOD-123", ComponentLink1Description=Digikey, ComponentLink1URL=https://www.digikey.com.au/product-detail/en/vishay-semiconductor-diodes-division/BZT52B3V3-G3-08/BZT52B3V3-G3-08GICT-ND/8284035, ComponentLink2Description=Datasheet, ComponentLink2URL=https://www.vishay.com/docs/83340/bzt52g.pdf
D7 D7: "Diode, Schottky Barrier Rectifier, 60 V, 2 A, B260A-13-F"
D11: "Very low capacitance ESD protection, 3.5 pF, -40 to 125 degC, 6-Pin SOT23, RoHS, Tape and Reel"
DS1A DS1B DS1C DS2A DS2B DS2C: library part "LED BLUE 0603"
J1: "Battery Retainer Coin, 12.0mm 1 Cell SMD (SMT) Tab"
J2A J2B J2C: library part "Jumper 2Way Side Solderable", "Jumper 2Way Side Solderable"
J3: "Connector Header Through Hole, Right Angle 60 position 0.118\" (3.00mm)", ComponentLink1Description=Digikey, ComponentLink1URL=https://www.digikey.com.au/products/en?keywords=3-6437285-2, ComponentLink2Description=TE, ComponentLink2URL=https://www.te.com/global-en/product-3-6437285-2.html
J5: "Micro-USB B Receptacle, Right Angle, Bottom Mount, Surface Mount, with Solder Tabs, -30 to 85 degC, 5-Pin USB, RoHS, Tape and Reel"
L1: library part "10uH, 10%, 0603", "10uH, 10%, 0603", ComponentLink1Description=Digikey, ComponentLink1URL=https://www.digikey.com.au/product-detail/en/w%C3%BCrth-elektronik/74404064221/732-7261-1-ND/5353241, ComponentLink2Description="LCSC A", ComponentLink2URL=https://lcsc.com/product-detail/Power-Inductors_Sunlord-SWPA6045S221MT_C91047.html, ComponentLink3Description="LCSC B", ComponentLink3URL=https://lcsc.com/product-detail/Power-Inductors_SXN-Shun-Xiang-Nuo-Elec-SMNR6045-221MT_C467145.html
L2: "FIXED IND 220UH 660MA 850 MOHM", ComponentLink1Description=Digikey, ComponentLink1URL=https://www.digikey.com.au/product-detail/en/w%C3%BCrth-elektronik/74404064221/732-7261-1-ND/5353241, ComponentLink2Description="LCSC A", ComponentLink2URL=https://lcsc.com/product-detail/Power-Inductors_Sunlord-SWPA6045S221MT_C91047.html, ComponentLink3Description="LCSC B", ComponentLink3URL=https://lcsc.com/product-detail/Power-Inductors_SXN-Shun-Xiang-Nuo-Elec-SMNR6045-221MT_C467145.html
L3: "47µH Semi-Shielded Wirewound Inductor 600mA 620mOhm Nonstandard", ComponentLink1Description=Digikey, ComponentLink1URL=https://www.digikey.com/product-detail/en/w%C3%BCrth-elektronik/74404042470/732-5512-1-ND/4865405, ComponentLink2Description="LCSC A", ComponentLink2URL=https://lcsc.com/product-detail/Power-Inductors_Sunlord-SWPA6045S221MT_C91047.html, ComponentLink3Description="LCSC B", ComponentLink3URL=https://lcsc.com/product-detail/Power-Inductors_SXN-Shun-Xiang-Nuo-Elec-SMNR6045-221MT_C467145.html
R1 R2 R3 R4 R5 R6 R9 R10 R11 R12 R13 R14: library part "4k7 5% 0603", "Resistor, SMD, 4k7, 0.1W, 5%, 0603"
R7 R15: library part "1k2 5% 0603", "Resistor, SMD, 1k2, 0.1W, 5%, 0603"
R8 R16: library part "47R 5% 0603", "Resistor, SMD, 47R, 0.1W, 5%, 0603"
R17A R17B R17C R18A R18B R18C: "Resistor, SMD, 330R, 0.1W, 5%, 0603"
R19A R19B R19C: "Resistor, SMD, 120R, 0.25W, 1%, 1210"
R20A R20B R20C R20D: "Resistor, SMD, 10k, 0.1W, 5%, 0603"
R21: "Resistor, SMD, 4k7, 0.1W, 5%, 0603"
R22: library part "64k9 1% 0603", "Resistor, SMD, 64k9, 0.1W, 5%, 0603"
R23 R23 R36: library part "1k 5% 0603", "Resistor, SMD, 1k, 0.1W, 5%, 0603"
R24: library part "19k6 1% 0603", "Resistor, SMD, 19k6, 0.1W, 5%, 0603"
R25 R37: library part "10k 5% 0603", "Resistor, SMD, 10k, 0.1W, 5%, 0603"
R26: library part "15k 5% 0603", "Resistor, SMD, 15k, 0.1W, 5%, 0603"
R27 R28: library part "22R 5% 0603", "Resistor, SMD, 22R, 0.1W, 5%, 0603"
R29 R30 R31: library part "100k 5%, 0603", "Resistor, SMD, 100k, 0.1W, 5%, 0603"
R32 R33: "Resistor, SMD, 1k, 0.1W, 5%, 0603"
R34: library part "111k 1% 0603", "Resistor, SMD, 111k, 0.1W, 5%, 0603"
R35: library part "20k 1% 0603", "Resistor, SMD, 20k, 0.1W, 1%, 0603"
R38 R42: library part "0R 5% 0603", "Resistor, SMD, 0R, 0.1W, 5%, 0603"
R39 R41: "Resistor, SMD, DNF, 0.1W, 0603"
R40: library part "820R 5% 0603", "Resistor, SMD, 820R, 0.1W, 5%, 0603"
SD1: "MicroSD Card Connector, Hinge Type, -40 to 85 degC, 8-Pin SMD, RoHS, Tape and Reel"
SW1: "Standard 4.5mm X 4.5mm momentary button", ComponentLink1Description=LCSC, ComponentLink1URL=https://lcsc.com/product-detail/Tactile-Switches_BRIGHT-TSA063G50-250_C294565.html
U1: "ARM® Cortex®-M7 STM32F7 Microcontroller IC 32-Bit 216MHz 2MB (2M x 8) FLASH 100-LQFP (14x14)", ComponentLink1Description=Digikey, ComponentLink1URL=https://www.digikey.com/product-detail/en/stmicroelectronics/STM32F765VIT6/497-16631-ND/6137842, ComponentLink2Description=Datasheet
U2: "8MHz XO (Standard) CMOS Oscillator 1.8 ~ 3.3V Standby (Power Down) 4-SMD, No Lead"
U3 U4: "Power Switch/Driver 1:1 N-Channel 3A PG-TSDSO-14-22", ComponentLink1Description=Digikey, ComponentLink1URL=https://www.digikey.com/product-detail/en/infineon-technologies/BTS70802EPAXUMA1/BTS70802EPAXUMA1CT-ND/8346497, ComponentLink2Description=Datasheet, ComponentLink2URL=https://www.infineon.com/dgdl/Infineon-BTS7080-2EPA-DataSheet-v01_06-EN.pdf?fileId=5546d4625e763904015e941bf21e2dbe
U7: library part CMP-0299-01479-2, "3-V to 5.5-V Multichannel RS-232 Line Driver / Receiver with ±15-kV IEC ESD Protection, 0 to 70 degC, 16-Pin TSSOP (PW), Green (RoHS & no Sb/Br)", Drivers Per Package=2, Supply Voltage(s)(V)="3.3 or 5.0", ComponentLink1Description="Manufacturer URL", ComponentLink1URL=www.ti.com, ComponentLink2Description=Datasheet, ComponentLink2URL=http://www.ti.com/general/docs/lit/getliterature.tsp?genericPartNumber=MAX3232E&fileType=pdf, ComponentLink3Description="Package Specification", ComponentLink3URL=http://www.ti.com/litv/pdf/mpds361, DatasheetVersion=SLLS664A, ESD HBM(kV)=+/-15, ICC(Max)(mA)=1, IEC-61000-4-2 SUPPORT=TRUE, PackageDescription="16-Pin Plastic Thin Small Outline Package 5 x 4.4 mm Body ,0.65 mm Pitch", PackageReference=PW0016A, PackageVersion="revG, Feb-2011", Receivers Per Package=2, RS-232=TRUE, Single Supply=TRUE, SubFamily=RS-232
U8: library part CMP-05679-000028-1, "IC TRANSCEIVER FULL 1/1 8SOIC", Manufacturer="Maxim Integrated", Max Junction Temp=+150°C, Max Supply Voltage=3.6V, Min Supply Voltage=3V, Nominal Supply Current=0.95-1.1mA, Package=S8-5, Temperature="-40°C to +85°C", Temperature Range High=+85°C, Temperature Range Low=-40°C, Automotive=No, Category=IC, ComponentLink2Description=Datasheet, ComponentLink2URL=https://datasheets.maximintegrated.com/en/ds/MAX3483E-MAX3491E.pdf, Data Rate=12Mbits/s, Device Class L1="Integrated Circuits (ICs)", Device Class L2="Interface ICs", Device Class L3="RS-232 / RS-422 / RS-485 Interface ICs", Digikey Description="IC TRANSCEIVER FULL 1/1 8SOIC", Footprint Url=https://pdfserv.maximintegrated.com/land_patterns/90-0096.PDF, Height=1.75mm, Interface=RS-485,RS-422, Lead Free=Yes, Manufacturer Part Number=MAX3490EESA+, Mouser Description="RS-422/RS-485 Interface IC 3.3V 12Mbps Transceiver", Number Of Receivers=1, Number Of Transmitters=1, Octopart=https://octopart.com/max3490eesa%2B-maxim+integrated-39731905, RoHS=TRUE, Simplex Duplex="Full Duplex", Standoff Height=0.1mm
U9: "32.768kHz XO (Standard) CMOS Oscillator 1.8V ~ 3.3V 4-SMD, No Lead"
U10: "OR Controller Source Selector Switch N-Channel 2:1 8-TSSOP", ComponentLink1Description=Digikey, ComponentLink1URL=https://www.digikey.com.au/product-detail/en/texas-instruments/TPS2115AIPWRQ1/296-24155-1-ND/2000840
D3A D3B D3C D5 D6 D8 D9 D10: ComponentLink1Description=Datasheet, ComponentLink1URL=https://www.onsemi.cn/PowerSolutions/document/NUP2105L-D.PDF, ComponentLink2Description=LCSC, ComponentLink2URL=https://lcsc.com/product-detail/TVS_ON-Semiconductor-NUP2105LT1G_C14486.html, ComponentLink3Description=Digikey, ComponentLink3URL=https://www.digikey.com.au/product-detail/en/on-semiconductor/SZNUP2105LT1G/SZNUP2105LT1GOSCT-ND/3487669
U5A U5B U5C: ComponentLink1Description=LCSC, ComponentLink1URL=https://lcsc.com/product-detail/CAN-ICs_Texas-Instruments_SN65HVD233DRG4_Texas-Instruments-Texas-Instruments-SN65HVD233DRG4_C61643.html, ComponentLink2Description=Digikey, ComponentLink2URL=https://www.digikey.com.au/product-detail/en/texas-instruments/SN65HVD233DR/296-35967-1-ND/4134960, ComponentLink3Description=Datasheet, ComponentLink3URL=https://www.ti.com/lit/ds/symlink/sn65hvd233.pdf?ts=1588560888178, ComponentLink4Description="Ti Product Page", ComponentLink4URL=https://www.ti.com/product/SN65HVD233

## Via types
v1: diameter 6.5, hole 6.5, Top Layer to Bottom Layer, 1 vias

## Nets (pads, with @x,y where several pads share a name; then routed paths per layer and width w, separated by ;. In a path a pad name is that pad's centre, name@x,y a point inside that pad or via, vN(x,y) a via of type N, cw(c..) or ccw(c..) an arc to the next point about the centre after c; other vN are vias at no path point)
3V3: C13A.2 C13B.2 C13C.2 C14.2 C15.2 C16.2 C22.2 C23.2 C24.2 C25.2 C26.2 C32.2 C33.2 C34.2 C38.2 C39.2 DS1A.1 DS1B.1 DS1C.1 DS2A.1 DS2B.1 DS2C.1 J4.1 L1.1 L3.2 R21.2 R22.2 R23.2@247.142,125.761 R37.2 SD1.4 U1.11 U1.20 U1.27 U1.50 U1.75 U1.100 U2.1 U2.4 U5A.3 U5B.3 U5C.3 U9.1 U9.4
5V: C20.2 C21.2 C42.2 J3.B12 J3.B20 L2.2 R23.2@247.142,114.712 R34.2 R38.2 U10.8
12V: C1.1 C4.2 C7.1 C10.2 U3.15 U4.15
AGND: J3.A5 J3.A20 J3.A21 J3.A22
AIN1: J3.A1
AIN2: J3.A2
AIN3: J3.A3
AIN4: J3.A4
AIN5: J3.A8
AIN6: J3.A9
AIN7: J3.A10
AIN8: J3.A11
AIN9: J3.A14
AIN10: J3.A15
AIN11: J3.A16
AIN12: J3.A17
"CAN H 1": D3A.2 J2A.1 J3.A6 U5A.7
"CAN H 2": D3B.2 J2B.1 J3.A12 U5B.7
"CAN H 3": D3C.2 J2C.1 J3.A18 U5C.7
"CAN L 1": D3A.1 J3.A7 R19A.1 U5A.6
"CAN L 2": D3B.1 J3.A13 R19B.1 U5B.6
"CAN L 3": D3C.1 J3.A19 R19C.1 U5C.6
"CAN RX LEDA": DS2A.2 R18A.2
"CAN RX LEDB": DS2B.2 R18B.2
"CAN RX LEDC": DS2C.2 R18C.2
"CAN TERMA": J2A.2 R19A.2
"CAN TERMB": J2B.2 R19B.2
"CAN TERMC": J2C.2 R19C.2
"CAN TX LEDA": DS1A.2 R17A.2
"CAN TX LEDB": DS1B.2 R17B.2
"CAN TX LEDC": DS1C.2 R17C.2
DIN1: R20A.2
DIN2: R20B.2
DIN3: R20C.2
DIN4: R20D.2
DOUT1: D4A.K R20A.1
DOUT2: D4B.K R20B.1
DOUT3: D4C.K R20C.1
DOUT4: D4D.K R20D.1
GND: C1.2 C2.1 C3.1 C5.1 C6.1 C7.2 C8.1 C9.1 C11.1 C12.1 C13A.1 C13B.1 C13C.1 C14.1 C15.1 C16.1 C18.1 C19.1 C20.1 C21.1 C22.1 C23.1 C24.1 C25.1 C26.1 C27.1 C28.1 C29.1 C30.1 C31.1 C32.1 C33.1 C34.1 C35.2 C36.1 C37.1 C38.1 C39.1 C40.1 C41.1 C42.1 D1.A D2.A D3A.3 D3B.3 D3C.3 D4A.A D4B.A D4C.A D4D.A D7.A D11.2 DS3.2 DS4.2 J1.2 J3.B19 J3.B27 J3.B28 J4.3 J4.5 J4.9 J5.5 R7.2 R8.1 R15.2 R16.1 R24.1 R26.2 R29.1 R30.2 R31.1 R35.1 R40.1 R41.1 R42.1 SD1.6 SW1.4 U1.10 U1.26 U1.49 U1.74 U2.2 U5A.2 U5A.8 U5B.2 U5B.8 U5C.2 U5C.8 U6.2 U9.2 U10.5
HSADC1: C5.2 C6.2 R5.1
HSADC2: C11.2 C12.2 R13.1
HSDIAG1: R3.1
HSDIAG2: R4.1
HSDIAG3: R11.1
HSDIAG4: R12.1
HSEN1: R1.1
HSEN2: R2.1
HSEN3: R9.1
HSEN4: R10.1
HSOUT1: C2.2 U3.13
HSOUT2: C3.2 U3.9
HSOUT3: C8.2 U4.13
HSOUT4: C9.2 U4.9
NetC4_1: C4.1 R8.2 U3.1
NetC10_1: C10.1 R16.2 U4.1
NetC31_2: C31.2 J5.6 J5.7 J5.8 J5.9 J5.10 J5.11 R30.1
NetC35_1: C35.1 R31.2 SD1.9 SD1.10 SD1.11 SD1.12
NetD1_K: D1.K R5.2 R6.1
NetD2_K: D2.K R13.2 R14.1
NetDS3_1: DS3.1@210.947,112.903 R23.1@247.142,113.126
NetDS4_1: DS4.1 R36.1
NetJ5_4: J5.4 R29.2
NetR1_2: R1.2 U3.2
NetR2_2: R2.2 U3.6
NetR3_2: R3.2 U3.5
NetR4_2: R4.2 U3.3
NetR6_2: R6.2 R7.1 U3.4
NetR9_2: R9.2 U4.2
NetR10_2: R10.2 U4.6
NetR11_2: R11.2 U4.5
NetR12_2: R12.2 U4.3
NetR14_2: R14.2 R15.1 U4.4
NetR17A_1: R17A.1 U5A.1
NetR17B_1: R17B.1 U5B.1
NetR17C_1: R17C.1 U5C.1
NetR18A_1: R18A.1 U5A.4
NetR18B_1: R18B.1 U5B.4
NetR18C_1: R18C.1 U5C.4
NetR38_1: R38.1 R41.2 U10.2
NetR39_1: R39.1 R42.2 U10.3
NetR40_2: R40.2 U10.4
NetU3_8: U3.8 U3.10
NetU3_12: U3.12 U3.14
NetU4_8: U4.8 U4.10
NetU4_12: U4.12 U4.14
NRST: C30.2 J4.10 R21.1 SW1.1 U1.14
"OSC32 IN": U1.8 U9.3
"OSC IN": U1.12 U2.3
PSEL: R37.1 U10.1
"PWR CB": C17.1@285.496,113.126 U6.1@279.661,125.52
"PWR CB 5V": C17.1@285.496,124.175 U6.1@279.661,114.471
"PWR FB": R22.1 R24.2 U6.3@279.661,123.62
"PWR FB 5V": R34.1 R35.2 U6.3@279.661,112.571
"PWR SW": C17.2@285.496,114.712 D7.K@253.746,114.141 L3.1 U6.6@281.961,125.52
"PWR SW 5V": C17.2@285.496,125.761 D7.K@253.746,125.19 L2.1 U6.6@281.961,114.471
"SD CLK": SD1.5
"SD CMD": SD1.3
"SD DATA0": SD1.7
"SD DATA1": SD1.8
"SD DATA2": SD1.1
"SD DATA3": SD1.2
SWCLK: J4.4 U1.76
SWDIO: J4.2 U1.72
"USB D_N": D11.1 J5.2
"USB D_P": D11.3 J5.3
"USB DET": R25.1 R26.1
"USB ESD D_N": D11.6 R27.2
"USB ESD D_P": D11.4 R28.2
USB_N: R27.1
USB_P: R28.1
VBAT: J1.1 U1.6
VBUS: C36.2 C37.2 U6.4@281.961,123.62 U6.5@281.961,124.57 U10.7
VCAP1: C28.2 U1.48
VCAP2: C29.2 U1.73
VCC: C18.2 C19.2 J3.B2 J3.B3 J3.B11 U6.4@281.961,112.571 U6.5@281.961,113.521
VDDA: C27.2 L1.2 U1.21
VUSB: C40.2 C41.2 D11.5 J5.1 R25.2 R36.2 R39.2 U10.6
pads on no net: D5.1 D5.2 D5.3 D6.1 D6.2 D6.3 D8.1 D8.2 D8.3 D9.1 D9.2 D9.3 D10.1 D10.2 D10.3 DS3.1@210.947,123.952 J3.A23 J3.A24 J3.A25 J3.A26 J3.B1 J3.B4 J3.B5 J3.B6 J3.B7 J3.B8 J3.B9 J3.B10 J3.B13 J3.B14 J3.B15 J3.B16 J3.B17 J3.B18 J3.B21 J3.B22 J3.B23 J3.B24 J3.B25 J3.B26 J3.B29 J3.B30 J3.B31 J3.B32 J3.B33 J3.B34 J3.N/C J4.6 J4.7 J4.8 R23.1@247.142,124.175 R32.1 R32.2 R33.1 R33.2 SW1.2 SW1.3 U1.1 U1.2 U1.3 U1.4 U1.5 U1.7 U1.9 U1.13 U1.15 U1.16 U1.17 U1.18 U1.19 U1.22 U1.23 U1.24 U1.25 U1.28 U1.29 U1.30 U1.31 U1.32 U1.33 U1.34 U1.35 U1.36 U1.37 U1.38 U1.39 U1.40 U1.41 U1.42 U1.43 U1.44 U1.45 U1.46 U1.47 U1.51 U1.52 U1.53 U1.54 U1.55 U1.56 U1.57 U1.58 U1.59 U1.60 U1.61 U1.62 U1.63 U1.64 U1.65 U1.66 U1.67 U1.68 U1.69 U1.70 U1.71 U1.77 U1.78 U1.79 U1.80 U1.81 U1.82 U1.83 U1.84 U1.85 U1.86 U1.87 U1.88 U1.89 U1.90 U1.91 U1.92 U1.93 U1.94 U1.95 U1.96 U1.97 U1.98 U1.99 U3.7 U3.11 U4.7 U4.11 U5A.5 U5B.5 U5C.5 U7.1 U7.2 U7.3 U7.4 U7.5 U7.6 U7.7 U7.8 U7.9 U7.10 U7.11 U7.12 U7.13 U7.14 U7.15 U7.16 U8.1 U8.2 U8.3 U8.4 U8.5 U8.6 U8.7 U8.8
copper on no net:
  other v1: 101.419,98.163

## Polygon pours and split planes (outlines as drawn)
no net on Top Overlay "NONET_L01_P-001" (solid): 120.269,65.405 119.253,66.421 119.253,66.294 118.618,65.659 117.983,65.659 117.856,65.532 117.856,65.405
no net on Top Overlay "NONET_L01_P-001" (solid): 115.443,65.405 116.459,66.421 116.459,66.294 117.094,65.659 117.729,65.659 117.856,65.532 117.856,65.405

## Silkscreen, mask and mechanical layers (free items; w line width, h text height)
Top Overlay:
  circle w0.254: c117.856,67.056 r1.5
  lines w0.254: 92.454,98.182 ccw(c101.454,98.182) 110.454,98.182 ; 93.419,98.163 ccw(c101.419,98.163) 109.419,98.163
  text "LED" at 115.443,63.119 h3.05
Mechanical 1:
  circle w0.254: c117.856,67.056 r3.5
  region: 156.21,36.83
  lines w0.254: 152.058,103.163 51.718,103.163 ccw(c51.718,98.163) 46.718,98.163 46.718,36.663 157.118,36.663 157.118,98.163 ccw(c152.118,98.163) 152.118,103.163

## Text inside footprints (layer, text, board x,y; h text height)
J1: Top Overlay "-" at 103.759,85.471 h1.52 r180; Top Overlay "+" at 94.869,84.328 h1.52 r180; Top Overlay "+" at 112.649,84.328 h1.52 r180